# Altium PCB 如意硬件采集模块0831.PcbDoc (part 3 of 3)
Units mm, origin at the board's own origin, x right, y up, seen from the top; angles counter-clockwise.
Board outline 146 x 59 mm, 2 copper layers (Top Layer, Bottom Layer); 262 components, 188 nets, 705 pads, 120 vias.
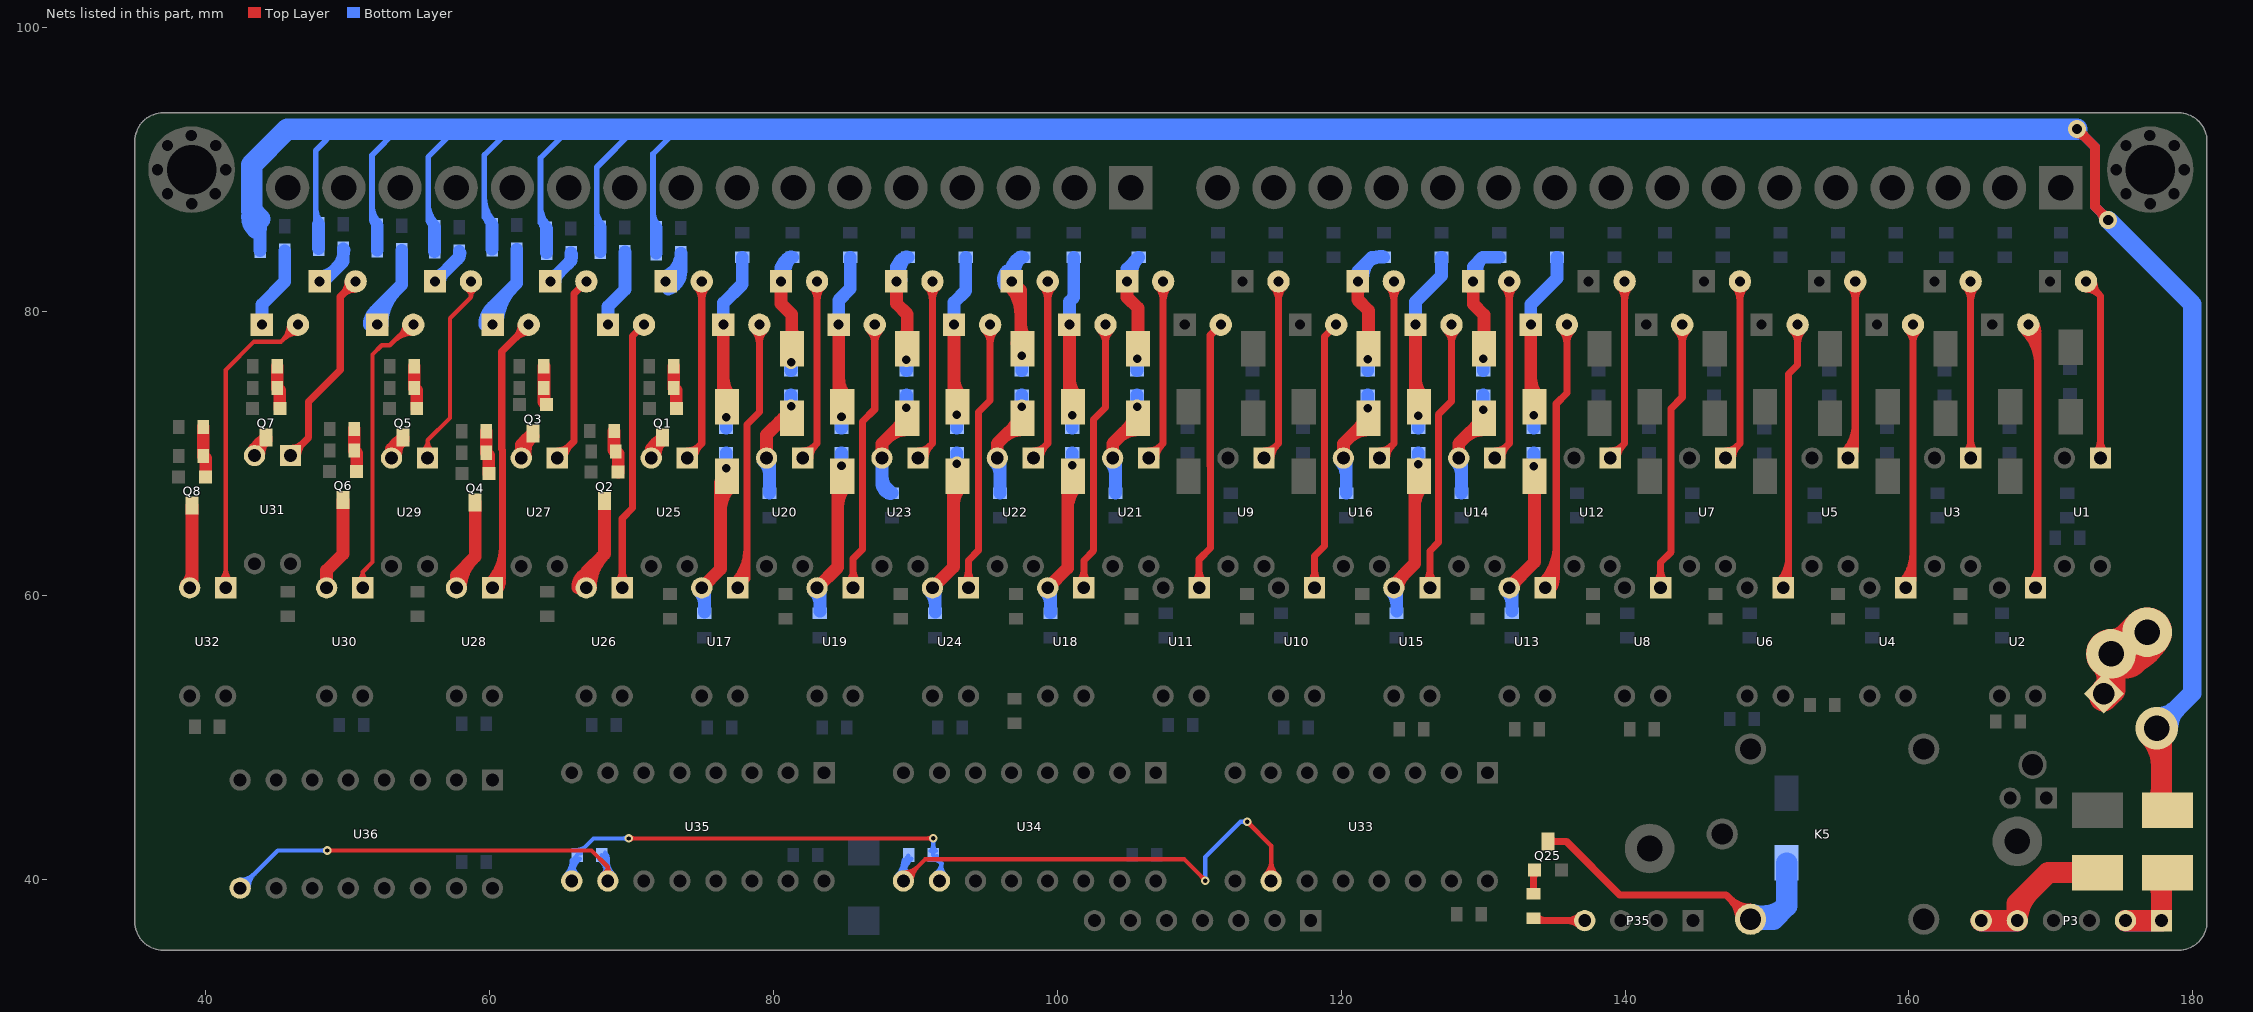
[diagram p3: the nets of this part, all layers, seen from the top]

## Via types
v1: diameter 1, hole 0.6, Top Layer to Bottom Layer, 53 vias
v2: diameter 0.6, hole 0.3, Top Layer to Bottom Layer, 29 vias
v3: diameter 1.27, hole 0.711, Top Layer to Bottom Layer, 19 vias
v4: diameter 1.5, hole 0.8, Top Layer to Bottom Layer, 17 vias
v5: diameter 3, hole 1.8, Top Layer to Bottom Layer, 1 vias
v6: diameter 0.7, hole 0.4, Top Layer to Bottom Layer, 1 vias

## Nets (pads, with @x,y where several pads share a name; then routed paths per layer and width w, separated by ;. In a path a pad name is that pad's centre, name@x,y a point inside that pad or via, vN(x,y) a via of type N, cw(c..) or ccw(c..) an arc to the next point about the centre after c; other vN are vias at no path point) (continued)
NetD13_1: D13.1 R42.2 R53.1 U13.2 | length 14
  Top Layer w0.9: U13.2@131.838,60.531 131.838,60.577 133.616,62.355 D13.1@133.616,68.405 ; U13.2@132.138,60.531 cw(c132.973,60.531) 132.382,61.121 ; D13.1@133.333,67.722 cw(c132.648,67.038) 133.616,67.038 cw(c134.584,67.038) D13.1@133.899,67.722
  Bottom Layer w0.9: U13.2@131.626,60.319 cw(c130.638,59.331) 132.035,59.331 ; R42.2@132.035,58.9 U13.2@132.035,60.334 ; v1@133.559,69.341 R53.1@133.559,70.053
  other v1: 133.575,69.1
NetD13_2: D13.2 LD13.1 R41.2 R53.2 | length 17.2
  Top Layer w0.9: LD13.1@133.123,78.834 cw(c132.547,78.258) 133.362,78.258 cw(c134.177,78.258) LD13.1@133.601,78.834 ; D13.2@133.362,73.559 LD13.1@133.362,79.073 ; 133.362,75.285 ccw(c135.197,75.285) D13.2@133.899,73.988 ; D13.2@133.362,73.287 ccw(c134.155,73.287) 133.594,72.726 cw(c134.155,73.287) D13.2@133.362,73.287
  Bottom Layer w0.9: LD13.1@133.123,79.312 ccw(c132.547,79.888) 133.362,79.888 ccw(c134.177,79.888) LD13.1@133.601,79.312 ; LD13.1@133.362,79.073 133.362,80.512 135.197,82.347 R41.2@135.197,83.826 ; R53.2@133.559,71.78 v1(133.559,72.691)
NetD14_1: D14.1 R44.2 R54.1 U14.2 | length 10.8
  Top Layer w0.9: U14.2@128.282,69.675 128.282,70.691 D14.1@130.06,72.469 ; 128.694,71.103 cw(c130.06,69.738) D14.1@130.06,71.669 ; D14.1@129.447,71.856 ccw(c128.224,73.078) D14.1@129.953,73.078
  Bottom Layer w0.9: U14.2@128.07,69.463 cw(c127.082,68.475) 128.479,68.475 ; R44.2@128.479,67.208 U14.2@128.479,69.478 ; v1(130.003,73.078) R54.1@130.003,74.117
NetD14_2: D14.2 LD14.1 R43.2 R54.2 | length 14.8
  Top Layer w0.9: LD14.1@129.059,81.882 cw(c128.483,81.306) 129.298,81.306 cw(c130.113,81.306) LD14.1@129.537,81.882 ; LD14.1@129.298,82.121 129.298,80.527 130.06,79.765 D14.2@130.06,77.369 ; D14.2@129.777,78.052 ccw(c129.092,78.736) 130.06,78.736 ccw(c131.028,78.736) D14.2@130.343,78.052
  Bottom Layer w0.9: LD14.1@129.059,82.36 ccw(c128.483,82.936) 129.298,82.936 ccw(c130.113,82.936) LD14.1@129.537,82.36 ; LD14.1@129.298,82.121 129.298,83.148 129.976,83.826 ; LD14.1@129.616,82.234 cw(c131.057,82.745) 129.976,83.826 ; R54.2@130.003,75.844 v1(130.003,76.672) ; R43.2@131.133,83.826 129.976,83.826
NetD15_1: D15.1 R46.2 R55.1 U15.2 | length 14.9
  Top Layer w0.9: U15.2@123.71,60.531 123.71,60.76 125.175,62.225 125.175,68.092 D15.1@125.488,68.405 ; U15.2@124.01,60.531 cw(c125.287,60.531) 124.384,61.434 ; 125.175,66.282 cw(c127.212,66.282) D15.1@125.771,67.722
  Bottom Layer w0.9: U15.2@123.498,60.319 cw(c122.51,59.331) 123.907,59.331 ; U15.2@123.71,60.531 123.907,60.334 R46.2@123.907,58.875 ; v1(125.431,69.231) R55.1@125.431,70.053
NetD15_2: D15.2 LD15.1 R45.2 R55.2 | length 17.2
  Top Layer w0.9: LD15.1@124.995,78.834 cw(c124.419,78.258) 125.234,78.258 cw(c126.049,78.258) LD15.1@125.473,78.834 ; D15.2@125.234,73.559 LD15.1@125.234,79.073 ; 125.234,75.285 ccw(c127.069,75.285) D15.2@125.771,73.988 ; D15.2@125.234,73.265 ccw(c126.027,73.265) 125.466,72.704 cw(c126.027,73.265) D15.2@125.234,73.265
  Bottom Layer w0.9: LD15.1@124.995,79.312 ccw(c124.419,79.888) 125.234,79.888 ccw(c126.049,79.888) LD15.1@125.473,79.312 ; LD15.1@125.234,79.073 125.234,80.684 127.069,82.519 R45.2@127.069,83.826 ; R55.2@125.431,71.78 v1(125.431,72.669)
NetD16_1: D16.1 R48.2 R56.1 U16.2 | length 10.9
  Top Layer w0.9: U16.2@120.154,69.675 120.154,70.691 D16.1@121.932,72.469 ; 120.566,71.103 cw(c121.932,69.738) D16.1@121.932,71.669 ; D16.1@121.232,71.769 ccw(c119.802,73.2) D16.1@121.825,73.2
  Bottom Layer w0.9: U16.2@119.942,69.463 cw(c118.954,68.475) 120.351,68.475 ; R48.2@120.351,67.208 U16.2@120.351,69.478 ; v1(121.875,73.2) R56.1@121.875,74.117
NetD16_2: D16.2 LD16.1 R47.2 R56.2 | length 16
  Top Layer w0.9: LD16.1@120.931,81.882 cw(c120.355,81.306) 121.17,81.306 cw(c121.985,81.306) LD16.1@121.409,81.882 ; LD16.1@121.17,82.121 121.17,80.83 121.932,80.068 D16.2@121.932,77.369 ; D16.2@121.649,78.052 ccw(c120.964,78.736) 121.932,78.736 ccw(c122.9,78.736) D16.2@122.215,78.052
  Bottom Layer w0.9: LD16.1@121.17,82.121 121.17,82.82 122.176,83.826 ; LD16.1@121.507,82.132 cw(c123.793,82.208) 122.176,83.826 ; 121.73,83.38 cw(c122.911,82.199) R47.2@122.911,83.87 ; 121.808,83.458 cw(c122.81,82.456) R47.2@122.915,83.869 ; R56.2@121.875,75.844 v1(121.875,76.625) ; R47.2@123.005,83.826 122.176,83.826
NetD17_1: D17.1 R66.2 R81.1 U17.2 | length 14.8
  Top Layer w0.9: U17.2@74.942,60.531 76.275,61.864 76.275,67.96 D17.1@76.72,68.405 ; 76.275,65.964 cw(c78.762,65.964) D17.1@77.003,67.722 ; D17.1@76.57,68.255 ccw(c76.198,68.627) D17.1@76.634,68.922
  Bottom Layer w0.9: U17.2@74.73,60.319 cw(c73.742,59.331) 75.139,59.331 ; R66.2@75.139,58.825 U17.2@75.139,60.334 ; v1@76.663,69.162 R81.1@76.663,70.053
  other v1: 76.675,68.95
NetD17_2: D17.2 LD17.1 R65.2 R81.2 | length 15.6
  Top Layer w0.9: LD17.1@76.227,78.834 cw(c75.651,78.258) 76.466,78.258 cw(c77.281,78.258) LD17.1@76.705,78.834 ; D17.2@76.466,73.559 LD17.1@76.466,79.073 ; 76.466,75.285 ccw(c78.301,75.285) D17.2@77.003,73.988
  Bottom Layer w0.9: LD17.1@76.227,79.312 ccw(c75.651,79.888) 76.466,79.888 ccw(c77.281,79.888) LD17.1@76.705,79.312 ; LD17.1@76.466,79.073 76.466,80.591 77.793,81.918 R65.2@77.793,83.826 ; R81.2@76.663,71.78 v1(76.663,72.562)
NetD18_1: D18.1 R68.2 R82.1 U18.2 | length 13.9
  Top Layer w0.9: U18.2@99.326,60.531 100.725,61.93 100.725,68.026 D18.1@101.104,68.405 ; 100.725,66.123 cw(c102.987,66.123) D18.1@101.387,67.722
  Bottom Layer w0.9: U18.2@99.114,60.319 cw(c98.126,59.331) 99.523,59.331 ; R68.2@99.523,58.775 U18.2@99.523,60.334 ; v1(101.047,69.153) R82.1@101.047,70.053
NetD18_2: D18.2 LD18.1 R67.2 R82.2 | length 16.5
  Top Layer w0.9: LD18.1@100.611,78.834 cw(c100.035,78.258) 100.85,78.258 cw(c101.665,78.258) LD18.1@101.089,78.834 ; D18.2@100.85,73.559 LD18.1@100.85,79.073 ; 100.85,75.285 ccw(c102.685,75.285) D18.2@101.387,73.988 ; D18.2@100.85,73.274 ccw(c101.643,73.274) 101.082,72.713 cw(c101.643,73.274) D18.2@100.85,73.274
  Bottom Layer w0.9: LD18.1@100.611,79.312 ccw(c100.035,79.888) 100.85,79.888 ccw(c101.665,79.888) LD18.1@101.089,79.312 ; LD18.1@100.85,79.073 100.85,80.7 101.161,81.011 R67.2@101.161,83.826 ; R82.2@101.047,71.78 v1(101.047,72.678)
NetD19_1: D19.1 R70.2 R83.1 U19.2 | length 13.7
  Top Layer w0.9: U19.2@83.07,60.531 84.525,61.986 84.525,68.082 D19.1@84.848,68.405 ; 84.525,66.258 cw(c86.596,66.258) D19.1@85.131,67.722
  Bottom Layer w0.9: U19.2@82.858,60.319 cw(c81.87,59.331) 83.267,59.331 ; R70.2@83.267,58.875 U19.2@83.267,60.334 ; v1(84.791,69.134) R83.1@84.791,70.053
NetD19_2: D19.2 LD19.1 R69.2 R83.2 | length 15.4
  Top Layer w0.9: LD19.1@84.355,78.834 cw(c83.779,78.258) 84.594,78.258 cw(c85.409,78.258) LD19.1@84.833,78.834 ; D19.2@84.594,73.559 LD19.1@84.594,79.073 ; 84.594,75.285 ccw(c86.429,75.285) D19.2@85.131,73.988
  Bottom Layer w0.9: LD19.1@84.355,79.312 ccw(c83.779,79.888) 84.594,79.888 ccw(c85.409,79.888) LD19.1@84.833,79.312 ; LD19.1@84.594,79.073 84.594,80.794 85.413,81.613 R69.2@85.413,83.826 ; R83.2@84.791,71.78 v1(84.791,72.591)
NetD20_1: D20.1 R72.2 R84.1 U20.2 | length 9.3
  Top Layer w0.9: U20.2@79.514,69.675 79.514,71.314 80.669,72.469 D20.1@81.292,72.469 ; 80.427,72.227 cw(c81.255,71.399) D20.1@81.32,72.568
  Bottom Layer w0.9: U20.2@79.302,69.463 cw(c78.314,68.475) 79.711,68.475 ; U20.2@79.514,69.675 79.711,69.478 R72.2@79.711,67.208 ; v1(81.235,73.31) R84.1@81.235,74.117
NetD20_2: D20.2 LD20.1 R71.2 R84.2 | length 16.8
  Top Layer w0.9: LD20.1@80.291,81.882 cw(c79.715,81.306) 80.53,81.306 cw(c81.345,81.306) LD20.1@80.769,81.882 ; LD20.1@80.53,82.121 80.53,80.545 81.292,79.783 D20.2@81.292,77.369 ; D20.2@81.009,78.052 ccw(c80.324,78.736) 81.292,78.736 ccw(c82.26,78.736) D20.2@81.575,78.052
  Bottom Layer w0.9: LD20.1@80.291,82.36 ccw(c79.715,82.936) 80.53,82.936 ccw(c81.345,82.936) LD20.1@80.769,82.36 ; LD20.1@80.53,82.121 80.53,83.105 R71.2@81.251,83.826 ; LD20.1@80.53,82.18 cw(c82.901,82.18) R71.2@81.225,83.857 ; LD20.1@80.53,82.803 cw(c81.682,82.803) R71.2@81.239,83.866 ; LD20.1@80.852,82.22 cw(c82.385,82.692) R71.2@81.251,83.826 ; R84.2@81.235,75.844 v1(81.235,76.44) ; R71.2@81.349,83.826 R71.2@81.251,83.826
NetD21_1: D21.1 R74.2 R85.1 U21.2 | length 11
  Top Layer w0.9: U21.2@103.898,69.675 103.898,70.691 D21.1@105.676,72.469 ; 104.31,71.103 cw(c105.676,69.738) D21.1@105.676,71.669 ; D21.1@104.91,71.703 ccw(c103.319,73.294) D21.1@105.569,73.294
  Bottom Layer w0.9: U21.2@103.686,69.463 cw(c102.698,68.475) 104.095,68.475 ; R74.2@104.095,67.208 U21.2@104.095,69.478 ; v1(105.619,73.294) R85.1@105.619,74.117
NetD21_2: D21.2 LD21.1 R73.2 R85.2 | length 13.8
  Top Layer w0.9: LD21.1@104.914,82.121 104.914,81.011 105.676,80.249 D21.2@105.676,77.369 ; D21.2@105.393,78.052 ccw(c104.708,78.736) 105.676,78.736 ccw(c106.644,78.736) D21.2@105.959,78.052 ; 104.914,81.306 ccw(c104.099,81.306) 104.675,81.882 cw(c104.099,81.306) 104.914,81.306 ; 104.914,81.306 cw(c105.729,81.306) 105.153,81.882 ccw(c105.729,81.306) 104.914,81.306
  Bottom Layer w0.9: LD21.1@104.914,82.121 104.914,83.007 R73.2@105.733,83.826 ccw(c107.003,82.555) LD21.1@105.244,82.19 ; R85.2@105.619,75.844 v1(105.619,76.681)
NetD22_1: D22.1 R76.2 R86.1 U22.2 | length 11
  Top Layer w0.9: U22.2@95.77,69.675 95.77,70.691 D22.1@97.548,72.469 ; 96.182,71.103 cw(c97.548,69.738) D22.1@97.548,71.669 ; D22.1@96.784,71.705 ccw(c95.198,73.291) D22.1@97.441,73.291
  Bottom Layer w0.9: U22.2@95.558,69.463 cw(c94.57,68.475) 95.967,68.475 ; R76.2@95.967,67.208 U22.2@95.967,69.478 ; v1(97.491,73.291) R86.1@97.491,74.117
NetD22_2: D22.2 LD22.1 R75.2 R86.2 | length 19.6
  Top Layer w0.9: LD22.1@96.547,81.882 cw(c94.429,79.764) 97.425,79.764 ; LD22.1@96.786,82.121 97.425,81.482 97.425,77.492 D22.2@97.548,77.369 ; D22.2@97.154,77.763 cw(c96.415,77.024) D22.2@97.45,76.882 ; 97.425,79.033 ccw(c98.813,79.033) D22.2@97.831,78.052
  Bottom Layer w0.9: LD22.1@96.263,81.913 cw(c97.079,82.237) LD22.1@96.458,82.858 ; LD22.1@96.547,82.36 ccw(c95.971,82.936) 96.786,82.936 ccw(c97.601,82.936) LD22.1@97.025,82.36 ; LD22.1@96.786,82.121 96.786,83.186 R75.2@97.426,83.826 ; LD22.1@96.786,82.18 cw(c99.157,82.18) R75.2@97.481,83.857 ; LD22.1@96.786,82.859 cw(c97.857,82.859) R75.2@97.497,83.867 ; LD22.1@97.1,82.246 cw(c98.464,82.788) R75.2@97.426,83.826 ; R86.2@97.491,75.844 v1@97.491,76.659 ; R75.2@97.605,83.826 R75.2@97.426,83.826
  other v1: 97.5,76.875
NetD23_1: D23.1 R78.2 R87.1 U23.2 | length 12.9
  Top Layer w0.9: U23.2@87.642,69.675 87.642,70.691 D23.1@89.42,72.469 ; 88.054,71.103 cw(c89.42,69.738) D23.1@89.42,71.669 ; D23.1@88.712,71.761 ccw(c87.261,73.212) D23.1@89.313,73.212
  Bottom Layer w0.9: 87.642,68.579 ccw(c89.624,68.579) R78.2@88.223,67.177 ; U23.2@87.642,69.675 87.642,67.913 ; R78.2@88.244,67.165 cw(c88.407,67.913) 87.642,67.913 ; R78.2@88.347,67.208 87.642,67.913 ; v1(89.363,73.212) R87.1@89.363,74.117
NetD23_2: D23.2 LD23.1 R77.2 R87.2 | length 16.9
  Top Layer w0.9: LD23.1@88.419,81.882 cw(c87.843,81.306) 88.658,81.306 cw(c89.473,81.306) LD23.1@88.897,81.882 ; LD23.1@88.658,82.121 88.658,80.567 89.42,79.805 D23.2@89.42,77.369 ; D23.2@89.137,78.052 ccw(c88.452,78.736) 89.42,78.736 ccw(c90.388,78.736) D23.2@89.703,78.052
  Bottom Layer w0.9: LD23.1@88.419,82.36 ccw(c87.843,82.936) 88.658,82.936 ccw(c89.473,82.936) LD23.1@88.897,82.36 ; LD23.1@88.658,82.121 88.658,83.158 R77.2@89.326,83.826 ; LD23.1@88.658,82.18 cw(c91.029,82.18) R77.2@89.353,83.857 ; LD23.1@88.658,82.84 cw(c89.756,82.84) R77.2@89.368,83.867 ; LD23.1@88.975,82.237 cw(c90.396,82.756) R77.2@89.326,83.826 ; R87.2@89.363,75.844 v1(89.363,76.587) ; R77.2@89.477,83.826 R77.2@89.326,83.826
NetD24_1: D24.1 R80.2 R88.1 U24.2 | length 13.6
  Top Layer w0.9: U24.2@91.198,60.531 92.675,62.008 92.675,68.104 D24.1@92.976,68.405 ; 92.675,66.311 cw(c94.671,66.311) D24.1@93.259,67.722
  Bottom Layer w0.9: U24.2@90.986,60.319 cw(c89.998,59.331) 91.395,59.331 ; R80.2@91.395,58.825 U24.2@91.395,60.334 ; v1(92.919,69.281) R88.1@92.919,70.053
NetD24_2: D24.2 LD24.1 R79.2 R88.2 | length 16.8
  Top Layer w0.9: LD24.1@92.483,78.834 cw(c91.907,78.258) 92.722,78.258 cw(c93.537,78.258) LD24.1@92.961,78.834 ; D24.2@92.722,73.559 LD24.1@92.722,79.073 ; 92.722,75.285 ccw(c94.557,75.285) D24.2@93.259,73.988 ; D24.2@92.722,73.327 ccw(c93.515,73.327) 92.954,72.766 cw(c93.515,73.327) D24.2@92.722,73.327
  Bottom Layer w0.9: LD24.1@92.483,79.312 ccw(c91.907,79.888) 92.722,79.888 ccw(c93.537,79.888) LD24.1@92.961,79.312 ; LD24.1@92.722,79.073 92.722,80.647 93.541,81.466 R79.2@93.541,83.826 ; R88.2@92.919,71.78 v1(92.919,72.731)
NetD57_1: D57.1 K5.2 Q25.C | length 29.2
  Top Layer w0.5: Q25.C@134.569,42.672 135.853,42.672 139.625,38.9 147.125,38.9 K5.2@148.845,37.18 ; Q25.C@134.716,42.525 cw(c135.069,42.172) 135.069,42.672 cw(c135.069,43.172) Q25.C@134.716,42.819 ; K5.2@147.995,37.18 ccw(c145.943,37.18) 147.394,38.631 ccw(c148.845,40.082) K5.2@148.845,38.03
  Bottom Layer w1.5: K5.2@148.845,37.18 150.455,37.18 151.384,38.109 ; K5.2@148.95,37.514 ccw(c149.677,39.816) 151.384,38.109 ; D57.1@151.384,41.148 151.384,38.109
NetF1_2: F1.2 P3.1 P3.2 | length 9.8
  Top Layer w1.5: P3.2@175.26,37.084 P3.1@177.8,37.084 177.8,39.624 F1.2@177.8,40.472 ; F1.2@177.321,40.118 cw(c176.166,38.963) 177.8,38.963
  Bottom Layer w1.5: P3.2@175.26,37.084 P3.1@177.8,37.084
NetF2_2: F2.2 P3.5 P3.6 | length 15.5
  Top Layer w1.5: P3.6@165.1,37.084 P3.5@167.64,37.084 ; 168.493,39.143 ccw(c170.552,37.084) P3.5@167.64,37.084 ; F2.2@173.7,40.472 169.822,40.472 167.64,38.29 P3.5@167.64,37.084
  Bottom Layer w1.5: P3.6@165.1,37.084 P3.5@167.64,37.084
NetLD1_2: LD1.2 U1.1 | length 16.8
  Top Layer w0.5: LD1.2@172.478,81.584 cw(c172.478,80.286) 173.395,81.204 cw(c174.313,82.121) LD1.2@173.015,82.121 ; LD1.2@172.478,82.121 173.494,81.105 U1.1@173.494,69.675 ; U1.1@173.14,70.029 ccw(c172.287,70.882) 173.494,70.882 ccw(c174.701,70.882) U1.1@173.848,70.029
NetLD2_2: LD2.2 U2.1 | length 26.3
  Top Layer w0.5: LD2.2@168.034,78.693 cw(c165.521,76.18) 169.075,76.18 ; LD2.2@168.388,79.047 cw(c166.728,77.387) 169.075,77.387 ; LD2.2@168.414,79.073 169.075,78.412 169.075,60.684 U2.1@168.922,60.531 ; U2.1@168.568,60.885 ccw(c167.346,62.107) 169.075,62.107 ; LD2.2@168.741,79.4 cw(c167.935,78.594) 169.075,78.594 ; 169.075,61.369 ccw(c169.76,61.369) U2.1@169.276,60.885
NetLD3_2: LD3.2 U6.1 | length 24
  Top Layer w0.5: U6.1@150.788,60.885 ccw(c149.01,62.663) 151.525,62.663 ; 151.525,61.456 cw(c150.217,61.456) U6.1@151.142,60.531 151.525,60.914 151.525,75.6 152.158,76.233 LD3.2@152.158,79.073 ; LD3.2@151.778,78.693 cw(c150.861,77.776) 152.158,77.776 cw(c153.455,77.776) LD3.2@152.538,78.693
NetLD4_2: LD4.2 U3.1 | length 16.4
  Top Layer w0.5: LD4.2@163.97,81.741 cw(c163.053,80.824) 164.35,80.824 cw(c165.647,80.824) LD4.2@164.73,81.741 ; U3.1@163.996,70.029 ccw(c163.143,70.882) 164.35,70.882 ccw(c165.557,70.882) U3.1@164.704,70.029 ; U3.1@164.35,69.675 LD4.2@164.35,82.121
NetLD5_2: LD5.2 U4.1 | length 24.5
  Top Layer w0.5: U4.1@159.424,60.885 ccw(c157.344,62.965) 160.286,62.965 ; LD5.2@159.906,78.693 cw(c158.989,77.776) 160.286,77.776 cw(c161.583,77.776) LD5.2@160.666,78.693 ; 160.286,61.757 cw(c158.552,61.757) U4.1@159.778,60.531 160.286,61.039 LD5.2@160.286,79.073
NetLD6_2: LD6.2 U5.1 | length 18.4
  Top Layer w0.5: U5.1@155.36,70.029 ccw(c153.28,72.109) 156.222,72.109 ; LD6.2@155.842,81.741 cw(c154.925,80.824) 156.222,80.824 cw(c157.519,80.824) LD6.2@156.602,81.741 ; 156.222,70.901 cw(c154.488,70.901) U5.1@155.714,69.675 156.222,70.183 LD6.2@156.222,82.121
NetLD7_2: LD7.2 U7.1 | length 16.8
  Top Layer w0.5: U7.1@147.078,69.675 148.094,70.691 LD7.2@148.094,82.121 ; U7.1@147.078,70.175 ccw(c147.078,71.382) 147.932,70.529 ccw(c148.785,69.675) U7.1@147.578,69.675 ; LD7.2@147.714,81.741 cw(c146.797,80.824) 148.094,80.824 cw(c149.391,80.824) LD7.2@148.474,81.741
NetLD8_2: LD8.2 U8.1 | length 23.1
  Top Layer w0.5: U8.1@142.152,60.885 ccw(c141.299,61.738) 142.506,61.738 ccw(c143.713,61.738) U8.1@142.86,60.885 ; U8.1@142.506,60.531 142.506,62.306 143.25,63.05 143.25,73.175 144.03,73.955 LD8.2@144.03,79.073 ; LD8.2@143.65,78.693 cw(c142.733,77.776) 144.03,77.776 cw(c145.327,77.776) LD8.2@144.41,78.693
NetLD9_2: LD9.2 U9.1 | length 16.8
  Top Layer w0.5: U9.1@114.566,69.675 115.582,70.691 LD9.2@115.582,82.121 ; U9.1@114.566,70.175 ccw(c114.566,71.382) 115.42,70.529 ccw(c116.273,69.675) U9.1@115.066,69.675 ; LD9.2@115.202,81.741 cw(c114.285,80.824) 115.582,80.824 cw(c116.879,80.824) LD9.2@115.962,81.741
NetLD10_2: LD10.2 U10.1 | length 21.1
  Top Layer w0.5: U10.1@117.768,60.885 ccw(c116.915,61.738) 118.122,61.738 ccw(c119.329,61.738) U10.1@118.476,60.885 ; U10.1@118.122,60.531 118.122,62.772 118.825,63.475 118.825,78.252 LD10.2@119.646,79.073
NetLD11_2: LD11.2 U11.1 | length 21.1
  Top Layer w0.5: U11.1@109.64,60.885 ccw(c108.787,61.738) 109.994,61.738 ccw(c111.201,61.738) U11.1@110.348,60.885 ; U11.1@109.994,60.531 109.994,62.544 110.8,63.35 110.8,69.1 110.772,69.128 110.772,78.327 LD11.2@111.518,79.073
NetLD12_2: LD12.2 U12.1 | length 16.8
  Top Layer w0.5: U12.1@138.95,69.675 139.966,70.691 LD12.2@139.966,82.121 ; U12.1@138.95,70.175 ccw(c138.95,71.382) 139.804,70.529 ccw(c140.657,69.675) U12.1@139.45,69.675 ; LD12.2@139.586,81.741 cw(c138.669,80.824) 139.966,80.824 cw(c141.263,80.824) LD12.2@140.346,81.741
NetLD13_2: LD13.2 U13.1 | length 27.4
  Top Layer w0.5: U13.1@134.024,60.885 ccw(c131.307,63.602) 135.15,63.602 ; U13.1@134.732,60.177 ccw(c133.721,61.188) 135.15,61.188 ; 135.15,62.395 cw(c132.514,62.395) U13.1@134.378,60.531 135.15,61.303 135.15,73.5 135.902,74.252 LD13.2@135.902,79.073 ; LD13.2@135.522,78.693 cw(c134.605,77.776) 135.902,77.776 cw(c137.199,77.776) LD13.2@136.282,78.693
NetLD14_2: LD14.2 U14.1 | length 16.8
  Top Layer w0.5: U14.1@130.822,69.675 131.838,70.691 LD14.2@131.838,82.121 ; U14.1@130.822,70.175 ccw(c130.822,71.382) 131.676,70.529 ccw(c132.529,69.675) U14.1@131.322,69.675 ; LD14.2@131.458,81.741 cw(c130.541,80.824) 131.838,80.824 cw(c133.135,80.824) LD14.2@132.218,81.741
NetLD15_2: LD15.2 U15.1 | length 23.1
  Top Layer w0.5: U15.1@125.896,60.885 ccw(c125.043,61.738) 126.25,61.738 ccw(c127.457,61.738) U15.1@126.604,60.885 ; U15.1@126.25,60.531 126.25,63.125 126.843,63.718 126.843,72.743 127.774,73.674 LD15.2@127.774,79.073 ; LD15.2@127.394,78.693 cw(c126.477,77.776) 127.774,77.776 cw(c129.071,77.776) LD15.2@128.154,78.693
NetLD16_2: LD16.2 U16.1 | length 16.8
  Top Layer w0.5: U16.1@122.694,69.675 123.71,70.691 LD16.2@123.71,82.121 ; U16.1@122.694,70.175 ccw(c122.694,71.382) 123.548,70.529 ccw(c124.401,69.675) U16.1@123.194,69.675 ; LD16.2@123.33,81.741 cw(c122.413,80.824) 123.71,80.824 cw(c125.007,80.824) LD16.2@124.09,81.741
NetLD17_2: LD17.2 U17.1 | length 25.6
  Top Layer w0.5: U17.1@77.128,60.885 ccw(c74.723,63.29) 78.125,63.29 ; 78.125,62.083 cw(c75.93,62.083) U17.1@77.482,60.531 78.125,61.174 78.125,72.05 79.006,72.931 LD17.2@79.006,79.073 ; LD17.2@78.626,78.693 cw(c77.709,77.776) 79.006,77.776 cw(c80.303,77.776) LD17.2@79.386,78.693
NetLD18_2: LD18.2 U18.1 | length 23.1
  Top Layer w0.5: U18.1@101.512,60.885 ccw(c100.659,61.738) 101.866,61.738 ccw(c103.073,61.738) U18.1@102.22,60.885 ; U18.1@101.866,60.531 101.866,62.466 102.55,63.15 102.55,72.4 103.39,73.24 LD18.2@103.39,79.073 ; LD18.2@103.01,78.693 cw(c102.093,77.776) 103.39,77.776 cw(c104.687,77.776) LD18.2@103.77,78.693
NetLD19_2: LD19.2 U19.1 | length 23.1
  Top Layer w0.5: U19.1@85.256,60.885 ccw(c84.403,61.738) 85.61,61.738 ccw(c86.817,61.738) U19.1@85.964,60.885 ; U19.1@85.61,60.531 85.61,62.585 86.275,63.25 86.275,72.25 87.134,73.109 LD19.2@87.134,79.073 ; LD19.2@86.754,78.693 cw(c85.837,77.776) 87.134,77.776 cw(c88.431,77.776) LD19.2@87.514,78.693
NetLD20_2: LD20.2 U20.1 | length 16.8
  Top Layer w0.5: U20.1@82.054,69.675 83.07,70.691 LD20.2@83.07,82.121 ; U20.1@82.054,70.175 ccw(c82.054,71.382) 82.908,70.529 ccw(c83.761,69.675) U20.1@82.554,69.675 ; LD20.2@82.69,81.741 cw(c81.773,80.824) 83.07,80.824 cw(c84.367,80.824) LD20.2@83.45,81.741
NetLD21_2: LD21.2 U21.1 | length 16.8
  Top Layer w0.5: U21.1@106.438,69.675 107.454,70.691 LD21.2@107.454,82.121 ; U21.1@106.438,70.175 ccw(c106.438,71.382) 107.292,70.529 ccw(c108.145,69.675) U21.1@106.938,69.675 ; LD21.2@107.074,81.741 cw(c106.157,80.824) 107.454,80.824 cw(c108.751,80.824) LD21.2@107.834,81.741
NetLD22_2: LD22.2 U22.1 | length 16.8
  Top Layer w0.5: U22.1@98.31,69.675 99.326,70.691 LD22.2@99.326,82.121 ; U22.1@98.31,70.175 ccw(c98.31,71.382) 99.164,70.529 ccw(c100.017,69.675) U22.1@98.81,69.675 ; LD22.2@98.946,81.741 cw(c98.029,80.824) 99.326,80.824 cw(c100.623,80.824) LD22.2@99.706,81.741
NetLD23_2: LD23.2 U23.1 | length 16.8
  Top Layer w0.5: U23.1@90.182,69.675 91.198,70.691 LD23.2@91.198,82.121 ; U23.1@90.182,70.175 ccw(c90.182,71.382) 91.036,70.529 ccw(c91.889,69.675) U23.1@90.682,69.675 ; LD23.2@90.818,81.741 cw(c89.901,80.824) 91.198,80.824 cw(c92.495,80.824) LD23.2@91.578,81.741
NetLD24_2: LD24.2 U24.1 | length 23.1
  Top Layer w0.5: U24.1@93.384,60.885 ccw(c92.531,61.738) 93.738,61.738 ccw(c94.945,61.738) U24.1@94.092,60.885 ; U24.1@93.738,60.531 93.738,62.463 94.45,63.175 94.45,72.925 95.262,73.737 LD24.2@95.262,79.073 ; LD24.2@94.882,78.693 cw(c93.965,77.776) 95.262,77.776 cw(c96.559,77.776) LD24.2@95.642,78.693
NetLD25_1: LD25.1 R113.2 | length 7.4
  Bottom Layer w0.9: LD25.1@72.291,82.44 ccw(c71.711,84.11) R113.2@73.479,84.11 73.479,83.004 72.596,82.121 LD25.1@72.402,82.121 ; LD25.1@72.402,82.458 ccw(c72.402,83.741) 73.309,82.834 ; LD25.1@72.587,81.59 ccw(c72.151,82.844) 73.479,82.844
NetLD25_2: LD25.2 U25.1 | length 16.8
  Top Layer w0.5: U25.1@73.926,69.675 74.942,70.691 LD25.2@74.942,82.121 ; U25.1@73.926,70.175 ccw(c73.926,71.382) 74.78,70.529 ccw(c75.633,69.675) U25.1@74.426,69.675 ; LD25.2@74.562,81.741 cw(c73.645,80.824) 74.942,80.824 cw(c76.239,80.824) LD25.2@75.322,81.741
NetLD26_1: LD26.1 R114.2 | length 6.9
  Bottom Layer w0.9: LD26.1@68.099,79.312 ccw(c67.523,79.888) 68.338,79.888 ccw(c69.153,79.888) LD26.1@68.577,79.312 ; LD26.1@68.338,79.073 68.338,80.363 69.534,81.559 R114.2@69.534,84.197
NetLD26_2: LD26.2 U26.1 | length 21.1
  Top Layer w0.5: U26.1@68.988,60.885 ccw(c68.135,61.738) 69.342,61.738 ccw(c70.549,61.738) U26.1@69.696,60.885 ; U26.1@69.342,60.531 69.342,65.417 70.075,66.15 70.075,78.27 LD26.2@70.878,79.073
NetLD27_1: LD27.1 R119.2 | length 4.6
  Bottom Layer w0.9: LD27.1@64.274,82.121 65.739,83.586 R119.2@65.739,84.122 ; LD27.1@64.274,82.458 ccw(c64.274,83.273) 64.85,82.697 ccw(c65.426,82.121) LD27.1@64.611,82.121 ; 65.501,83.348 ccw(c64.82,84.028) R119.2@65.783,84.028
NetLD27_2: LD27.2 U27.1 | length 15.2
  Top Layer w0.5: U27.1@64.77,69.675 65.95,70.855 65.95,81.257 LD27.2@66.814,82.121 ; U27.1@64.77,70.175 ccw(c64.77,71.382) 65.624,70.529 ccw(c66.477,69.675) U27.1@65.27,69.675
NetLD28_1: LD28.1 R115.2 | length 11.6
  Bottom Layer w0.9: LD28.1@59.647,79.073 cw(c61.276,79.073) 60.124,80.224 ; LD28.1@59.971,79.312 ccw(c59.395,79.888) 60.21,79.888 ccw(c61.025,79.888) LD28.1@60.449,79.312 ; LD28.1@60.21,79.073 60.21,80.31 61.911,82.011 R115.2@61.911,84.38 ; LD28.1@60.547,79.073 cw(c64.348,79.073) 61.661,81.761
NetLD28_2: LD28.2 U28.1 | length 27.4
  Top Layer w0.5: U28.1@59.844,60.885 ccw(c57.284,63.445) 60.905,63.445 ; U28.1@60.552,60.177 ccw(c59.698,61.031) U28.1@60.905,61.031 ; 60.905,62.238 cw(c58.491,62.238) U28.1@60.198,60.531 60.905,61.238 60.905,70.254 60.85,70.309 60.85,77.173 LD28.2@62.75,79.073 ; LD28.2@62.213,79.073 cw(c60.915,79.073) 61.833,78.156 cw(c62.75,77.238) LD28.2@62.75,78.536
NetLD29_1: LD29.1 R116.2 | length 4.6
  Bottom Layer w0.9: LD29.1@56.146,82.121 57.86,83.835 R116.2@57.86,84.222 ; LD29.1@56.146,82.458 ccw(c56.146,83.273) 56.722,82.697 ccw(c57.298,82.121) LD29.1@56.483,82.121 ; 57.727,83.702 ccw(c57.3,84.128) R116.2@57.904,84.128
NetLD29_2: LD29.2 U29.1 | length 16.9
  Top Layer w0.3: U29.1@55.25,70.143 ccw(c54.622,70.926) 55.626,70.926 ; U29.1@55.626,69.675 55.626,70.926 ; U29.1@56.002,70.143 cw(c56.63,70.926) 55.626,70.926 ; LD29.2@58.365,81.57 cw(c58.038,81.011) 58.686,81.011 ; LD29.2@58.686,82.121 58.686,81.011 ; LD29.2@59.007,81.57 ccw(c59.334,81.011) 58.686,81.011 ; 55.626,70.926 57.2,72.5 57.2,79.525 58.686,81.011
NetLD30_1: LD30.1 R120.2 | length 11
  Bottom Layer w0.9: LD30.1@51.519,79.073 cw(c52.839,79.073) 51.906,80.006 ; LD30.1@51.843,79.312 ccw(c51.267,79.888) 52.082,79.888 ccw(c52.897,79.888) LD30.1@52.321,79.312 ; LD30.1@52.082,79.073 52.082,80.182 53.813,81.913 R120.2@53.813,84.322 ; LD30.1@52.419,79.073 cw(c55.911,79.073) 53.442,81.542
NetLD30_2: LD30.2 U30.1 | length 25.4
  Top Layer w0.3: U30.1@50.72,61.03 ccw(c50.303,61.654) 51.054,61.654 ; U30.1@51.054,60.531 51.054,61.654 ; U30.1@51.388,61.03 cw(c51.805,61.654) 51.054,61.654 ; 53.18,77.838 cw(c54.622,76.396) LD30.2@54.622,78.436 ; 53.681,78.339 ccw(c52.947,79.073) LD30.2@53.985,79.073 ; 53.692,78.35 cw(c54.622,77.42) LD30.2@54.622,78.736 ; LD30.2@54.622,79.073 54.415,79.073 52.967,77.625 52.4,77.625 51.75,76.975 51.75,62.35 51.054,61.654
NetLD31_1: LD31.1 R117.2 | length 5.7
  Bottom Layer w0.9: LD31.1@48.018,82.121 48.271,82.121 49.692,83.542 R117.2@49.692,84.425 ; LD31.1@48.018,82.458 ccw(c48.018,83.884) 49.026,82.876 ; 49.208,83.058 ccw(c47.935,84.331) R117.2@49.736,84.331
NetLD31_2: LD31.2 U31.1 | length 18.1
  Top Layer w0.5: U31.1@45.974,69.85 47.25,71.126 47.25,73.65 49.475,75.875 49.475,81.038 LD31.2@50.558,82.121 ; U31.1@45.974,70.35 ccw(c45.974,71.557) 46.828,70.704 ccw(c47.681,69.85) U31.1@46.474,69.85 ; LD31.2@50.021,82.121 cw(c48.723,82.121) 49.641,81.204 cw(c50.558,80.286) LD31.2@50.558,81.584
NetLD32_1: LD32.1 R118.2 | length 7.2
  Bottom Layer w0.9: LD32.1@43.715,79.312 ccw(c43.139,79.888) 43.954,79.888 ccw(c44.769,79.888) LD32.1@44.193,79.312 ; LD32.1@43.954,79.073 43.954,80.504 45.561,82.111 R118.2@45.561,84.284
NetLD32_2: LD32.2 U32.1 | length 27.7
  Top Layer w0.3: U32.1@40.978,60.955 ccw(c39.953,61.98) 41.402,61.98 ccw(c42.851,61.98) U32.1@41.826,60.955 ; U32.1@41.402,60.531 41.402,75.885 43.396,77.879 45.3,77.879 LD32.2@46.494,79.073 ; LD32.2@45.857,79.073 cw(c44.318,79.073) 45.406,77.985 cw(c46.494,76.897) LD32.2@46.494,78.436 ; LD32.2@46.157,79.073 cw(c45.342,79.073) 45.918,78.497 cw(c46.494,77.921) LD32.2@46.494,78.736
NetQ1_1: Q1.1 R105.2 R121.2 | length 3.1
  Top Layer w0.9: R105.2@72.971,76.143 R121.2@72.971,74.619 73.152,74.438 Q1.1@73.152,73.152
NetQ1_2: Q1.2 U25.2 | length 6.5
  Top Layer w0.9: U25.2@71.386,69.443 cw(c73.173,69.443) Q1.2@72.191,70.936 ; U25.2@71.386,69.675 71.386,70.319 Q1.2@72.187,71.12 ccw(c73.422,69.885) U25.2@71.684,69.706 ; U25.2@71.386,69.928 cw(c72.42,69.928) Q1.2@72.188,70.935
NetQ2_1: Q2.1 R106.2 R122.2 | length 3
  Top Layer w0.9: R106.2@68.769,71.573 68.769,70.252 69.056,69.965 Q2.1@69.056,68.679
NetQ2_2: Q2.2 U26.2 | length 10.2
  Top Layer w0.9: U26.2@66.202,60.531 cw(c67.399,60.531) 66.553,61.378 ; U26.2@66.802,60.531 66.802,61.627 68.091,62.916 Q2.2@68.091,66.647 ; U26.2@67.102,60.531 cw(c70.472,60.531) 68.089,62.914
NetQ3_1: Q3.1 R107.2 R123.2 | length 3
  Top Layer w0.9: Q3.1@63.827,73.616 R123.2@63.827,74.619 R107.2@63.827,76.143 ; Q3.1@63.827,73.889 ccw(c64.462,73.889) Q3.1@64.013,73.44
NetQ3_2: Q3.2 U27.2 | length 7.3
  Top Layer w0.9: U27.2@62.23,69.475 cw(c64.501,69.475) Q3.2@63.047,71.22 ; U27.2@62.23,69.675 62.23,70.59 Q3.2@63.043,71.403 ccw(c64.37,70.075) U27.2@62.525,69.73 ; U27.2@62.23,70.194 cw(c63.281,70.194) Q3.2@63.044,71.218
NetQ4_1: Q4.1 R108.2 R124.2 | length 3.1
  Top Layer w0.9: R108.2@59.763,71.571 R124.2@59.763,70.047 59.944,69.866 Q4.1@59.944,68.58
NetQ4_2: Q4.2 U28.2 | length 8.8
  Top Layer w0.9: U28.2@57.658,60.531 57.658,61.408 58.979,62.729 Q4.2@58.979,66.548 ; U28.2@57.958,60.531 cw(c60.8,60.531) 58.79,62.54
NetQ5_1: Q5.1 R109.2 R125.2 | length 3.1
  Top Layer w0.9: R109.2@54.683,76.143 R125.2@54.683,74.619 54.864,74.438 Q5.1@54.864,73.152
NetQ5_2: Q5.2 U29.2 | length 6.5
  Top Layer w0.9: U29.2@53.086,69.437 cw(c54.871,69.437) Q5.2@53.903,70.936 ; U29.2@53.086,69.675 53.086,70.307 Q5.2@53.899,71.12 ccw(c55.157,69.862) U29.2@53.385,69.702 ; U29.2@53.086,69.911 cw(c54.137,69.911) Q5.2@53.9,70.935
NetQ6_1: Q6.1 R110.2 R126.2 | length 3.1
  Top Layer w0.9: R110.2@50.453,71.727 R126.2@50.453,70.203 50.634,70.022 Q6.1@50.634,68.736
NetQ6_2: Q6.2 U30.2 | length 6.7
  Top Layer w0.9: U30.2@48.514,60.531 48.514,61.764 49.669,62.919 Q6.2@49.669,66.704
NetQ7_1: Q7.1 R111.2 R127.2 | length 3.1
  Top Layer w0.9: R111.2@45.031,76.143 R127.2@45.031,74.619 45.212,74.438 Q7.1@45.212,73.152
NetQ7_2: Q7.2 U31.2 | length 6.1
  Top Layer w0.9: U31.2@43.434,69.581 cw(c44.967,69.581) Q7.2@44.25,70.936 ; U31.2@43.434,69.85 43.434,70.307 Q7.2@44.247,71.12 ccw(c45.485,69.881) U31.2@43.734,69.855 ; U31.2@43.434,69.911 cw(c44.485,69.911) Q7.2@44.248,70.935
NetQ8_1: Q8.1 R112.2 R128.2 | length 3.6
  Top Layer w0.9: R112.2@39.814,71.855 R128.2@39.814,69.823 39.995,69.642 Q8.1@39.995,68.356
NetQ8_2: Q8.2 U32.2 | length 6.6
  Top Layer w0.9: U32.2@38.65,60.743 ccw(c37.733,61.66) 39.03,61.66 ; U32.2@39.03,60.699 Q8.2@39.03,66.324
NetQ25_B: Q25.B R365.1 | length 2.1
  Top Layer w0.5: R365.1@133.547,38.992 Q25.B@133.547,40.583 ; 133.547,40.002 cw(c134.242,40.002) Q25.B@133.751,40.493
NetR206_1: R206.1 U33.10 U34.9 | length 46
  Top Layer w0.3: U34.9@89.154,39.878 90.676,41.4 108.95,41.4 v2@110.437,39.913 ; U34.9@89.154,40.478 ccw(c89.154,41.927) 90.178,40.902 ccw(c91.203,39.878) U34.9@89.754,39.878 ; 110.151,40.199 cw(c109.853,39.9) v2@110.275,39.9 ; 110.212,40.138 ccw(c110.425,40.352) v2@110.425,40.05 ; v2@113.375,43.9 cw(c113.375,43.538) 113.631,43.794 cw(c113.887,44.05) v2@113.525,44.05 ; v2(113.375,44.05) 115.062,42.363 U33.10@115.062,39.878 ; U33.10@114.638,40.302 ccw(c113.613,41.327) 115.062,41.327 ccw(c116.511,41.327) U33.10@115.486,40.302
  Bottom Layer w0.3: U34.9@88.73,40.302 ccw(c87.705,41.327) 89.154,41.327 ccw(c90.603,41.327) U34.9@89.578,40.302 ; U34.9@89.154,39.878 R206.1@89.154,41.335 ; U34.9@89.154,40.088 cw(c91.063,40.088) R206.1@89.713,41.438 ; 89.154,40.813 cw(c90.339,40.813) R206.1@89.501,41.65 ; v2@110.319,40.006 ccw(c110.063,40.262) 110.425,40.262 ccw(c110.787,40.262) v2@110.531,40.006 ; v2(110.425,39.9) 110.425,41.575 112.9,44.05 v2(113.375,44.05) ; v2@113.269,43.944 ccw(c113.013,43.688) 113.013,44.05 ccw(c113.013,44.412) v2@113.269,44.156
NetR206_2: R206.2 R207.1 U34.10 U35.9 | length 42.5
  Top Layer w0.3: v2(69.8,42.875) 91.175,42.875 v2@91.2,42.85 ; v2@69.906,42.769 cw(c70.162,42.513) 70.162,42.875 cw(c70.162,43.237) v2@69.906,42.981 ; 90.858,42.875 ccw(c90.858,43.292) v2@91.153,42.997 ; 90.935,42.875 cw(c90.935,42.567) v2@91.153,42.785
  Bottom Layer w0.3: U35.9@65.362,40.302 ccw(c64.337,41.327) 65.786,41.327 ccw(c67.235,41.327) U35.9@66.21,40.302 ; U35.9@65.786,39.878 R207.1@65.786,41.335 ; U35.9@65.786,40.088 cw(c67.695,40.088) R207.1@66.345,41.438 ; 65.786,40.813 cw(c66.971,40.813) R207.1@66.133,41.65 ; R207.1@66.164,41.713 67.326,42.875 v2(69.8,42.875) ; R207.1@66.164,42.063 ccw(c66.164,42.908) 66.761,42.31 ; R207.1@66.42,41.807 cw(c66.813,41.807) R207.1@66.535,42.085 ; v2@69.694,42.769 ccw(c69.438,42.513) 69.438,42.875 ccw(c69.438,43.237) v2@69.694,42.981 ; R206.2@91.078,41.988 ccw(c90.64,42.426) 91.259,42.426 ccw(c91.878,42.426) R206.2@91.44,41.988 ; v2@91.153,42.785 cw(c90.897,42.529) 91.259,42.529 cw(c91.621,42.529) v2@91.365,42.785 ; R206.2@91.259,41.363 cw(c91.259,40.518) 91.856,41.116 ; v2(91.259,42.891) R206.2@91.259,41.713 91.825,41.147 ; U34.10@91.393,40.397 ccw(c90.958,41.147) 91.825,41.147 ; R206.2@91.515,41.619 ccw(c91.908,41.619) R206.2@91.631,41.341 ; U34.10@91.544,40.138 ccw(c91.26,40.626) 91.825,40.626 ; U34.10@91.694,39.878 91.825,40.009 91.825,41.147 ; 91.825,41.01 ccw(c92.826,41.01) U34.10@92.118,40.302
NetR207_2: R207.2 U35.10 U36.9 | length 40.5
  Top Layer w0.3: v2(48.55,42.025) 67.175,42.025 68.326,40.874 ; v2@48.656,41.919 cw(c48.912,41.663) 48.912,42.025 cw(c48.912,42.387) v2@48.656,42.131 ; U35.10@68.046,40.408 ccw(c67.799,40.874) 68.326,40.874 ; U35.10@68.326,39.878 68.326,40.874 ; U35.10@68.606,40.408 cw(c68.853,40.874) 68.326,40.874
  Bottom Layer w0.3: U36.9@42.418,39.37 45.073,42.025 v2(48.55,42.025) ; U36.9@42.418,39.97 ccw(c42.418,41.419) 43.442,40.394 ccw(c44.467,39.37) U36.9@43.018,39.37 ; v2@48.444,41.919 ccw(c48.188,41.663) 48.188,42.025 ccw(c48.188,42.387) v2@48.444,42.131 ; R207.2@67.71,41.438 cw(c66.222,39.95) U35.10@68.326,39.95 ; R207.2@67.891,41.713 68.326,41.278 ; U35.10@67.912,40.312 ccw(c66.993,41.278) 68.326,41.278 ; R207.2@67.922,41.65 cw(c66.946,40.674) 68.326,40.674 ; R207.2@68.134,41.862 cw(c67.67,41.399) 68.326,41.399 ; U35.10@68.326,39.878 68.326,41.278 ; U35.10@68.74,40.312 cw(c69.659,41.278) 68.326,41.278
RELAY1: P35.4 R365.2 | length 6.4
  Top Layer w0.5: R365.2@133.547,37.265 133.728,37.084 P35.4@137.16,37.084 ; R365.2@133.751,37.376 ccw(c134.455,38.08) 134.455,37.084 ; P35.4@136.806,36.73 ccw(c135.953,35.877) 135.953,37.084 ccw(c135.953,38.291) P35.4@136.806,37.438
VCC_DI: F1.1 R97.2 R98.2 R99.2 R100.2 R101.2 R102.2 R103.2 R104.2 R113.1 R114.1 R115.1 R116.1 R117.1 R118.1 R119.1 R120.1 | length 288.1
  Top Layer w0.7: v3@171.85,92.565 cw(c171.85,91.877) 172.337,92.363 cw(c172.823,92.85) v3@172.135,92.85 ; v3(171.85,92.85) 173.1,91.6 173.1,87.394 v3(174.044,86.45) ; v3@173.759,86.45 ccw(c173.071,86.45) 173.557,86.937 ccw(c174.044,87.423) v3@174.044,86.735
  Top Layer w1.5: v5@176.945,50.095 cw(c174.88,48.03) 177.8,48.03 ; F1.1@177.321,45.226 ccw(c176.166,46.381) 177.8,46.381 ; v5(177.475,50.625) 177.475,50.5 177.8,50.175 F1.1@177.8,44.872
  Bottom Layer w0.4: 47.75,87.213 ccw(c48.921,87.213) R103.2@48.093,86.386 ; R103.2@47.947,86.146 47.75,86.343 47.75,91.35 49.25,92.85 ; 51.706,86.558 ccw(c52.495,86.558) R102.2@51.937,86 ; 51.706,87.523 ccw(c53.461,87.523) R102.2@52.22,86.283 ; R102.2@52.074,86.043 51.706,86.411 51.706,91.006 53.55,92.85 ; 55.666,86.668 ccw(c56.752,86.668) R101.2@55.984,85.9 ; 55.666,87.633 ccw(c57.718,87.633) R101.2@56.267,86.183 ; R101.2@56.121,85.943 55.666,86.398 55.666,90.891 57.625,92.85 ; 59.626,87.045 ccw(c61.023,87.045) R100.2@60.035,86.058 ; 59.626,88.011 ccw(c61.989,88.011) R100.2@60.318,86.341 ; 59.673,86.6 ccw(c60.154,87.082) R100.2@60.168,86.401 ; R100.2@60.172,86.101 59.626,86.647 59.626,91.026 61.45,92.85 ; 63.586,86.469 ccw(c64.532,86.469) R99.2@63.863,85.8 ; 63.586,87.434 ccw(c65.498,87.434) R99.2@64.146,86.083 ; R99.2@64,85.843 63.586,86.257 63.586,90.811 65.625,92.85 ; 67.546,87.111 ccw(c68.894,87.111) R98.2@67.941,86.158 ; R98.2@67.795,85.918 67.546,86.167 67.546,90.171 70.225,92.85 ; 71.506,87.02 ccw(c72.783,87.02) R97.2@71.88,86.118 ; R97.2@71.734,85.878 71.506,86.106 71.506,91.106 73.25,92.85
  Bottom Layer w0.7: v3@171.85,92.565 cw(c171.85,91.877) 172.337,92.363 cw(c172.823,92.85) v3@172.135,92.85 ; v3(171.85,92.85) 173.1,91.6 173.1,87.394 v3(174.044,86.45) ; v3@173.759,86.45 ccw(c173.071,86.45) 173.557,86.937 ccw(c174.044,87.423) v3@174.044,86.735
  Bottom Layer w0.9: R118.1@43.823,84.295 R104.2@43.823,86.005 ; R117.1@47.947,84.443 R103.2@47.947,86.146 ; R120.1@52.074,84.334 R102.2@52.074,86.043 ; R116.1@56.121,84.234 R101.2@56.121,85.943 ; R115.1@60.172,84.392 R100.2@60.172,86.101 ; R119.1@64,84.134 R99.2@64,85.843 ; R114.1@67.795,84.209 R98.2@67.795,85.918 ; R113.1@71.734,84.128 R97.2@71.734,85.878
  Bottom Layer w1.3: v3(174.044,86.45) 179.969,80.525 179.969,53.119 v5(177.475,50.625) ; v5@177.475,51.475 ccw(c177.475,53.527) 178.926,52.076 ccw(c180.377,50.625) v5@178.325,50.625
  Bottom Layer w1.5: 43.823,86.512 43.24,87.095 43.24,90.346 45.744,92.85 49.25,92.85 53.55,92.85 57.625,92.85 61.45,92.85 65.625,92.85 70.225,92.85 73.25,92.85 v3(171.85,92.85) ; 43.24,86.677 ccw(c44.401,86.677) 43.58,85.856 cw(c44.401,86.677) 43.24,86.677
VCC_DI0: D56.2 P45.1 P47.1 | length 15.7
  Top Layer w2: D56.2@173.706,52.802 174.244,53.34 P45.1@174.244,55.88 ; P45.1@173.714,55.35 cw(c172.433,54.069) 174.244,54.069 cw(c176.055,54.069) P45.1@174.774,55.35 ; D56.2@173.731,53.077 ccw(c172.493,54.315) P45.1@174.244,54.315
  Top Layer w3.5: P47.1@175.978,56.598 cw(c174.244,58.333) P45.1@174.244,55.88 ; P45.1@174.244,55.88 ccw(c174.244,58.759) P47.1@176.784,57.404 175.26,55.88 P45.1@174.244,55.88
pads on no net: Designator12.0 Designator12.2 Designator12.3 Designator12.4 Designator12.5 Designator12.6 Designator12.7 Designator12.8 Designator12.9 Designator13.0 Designator13.2 Designator13.3 Designator13.4 Designator13.5 Designator13.6 Designator13.7 Designator13.8 Designator13.9 K5.5 P3.3 P3.4 U33.9 U34.7 U35.7 U36.7
copper on no net: | length 9.8
  Top Layer w1.5: 44.958,46.99 44.958,48.142 ; 68.326,47.498 68.326,48.774 ; 91.694,47.498 91.694,47.744 92.5,48.55 ; 170.18,36.136 170.18,37.084 ; 172.72,36.136 172.72,37.084
  Bottom Layer w1.5: 44.958,46.99 44.958,48.242 ; 112.522,39.878 112.522,40.853 ; 170.18,36.151 170.18,37.084 ; 172.72,36.136 172.72,37.084

## Polygon pours and split planes (outlines as drawn)
GND on Top Layer "Top Layer-No Net" (hatched 90Degree grid 0 track 0.203, remove dead copper, pour order 1000): 35.125,93.875 35.125,35.125 180.875,35.125 180.875,93.875
GND on Bottom Layer "Top Layer-No Net" (hatched 90Degree grid 0 track 0.203, remove dead copper, pour order 1001): 35.125,93.875 35.125,35.125 180.875,35.125 180.875,93.875

## Keep-outs
Keep-Out Layer:
  lines w0.254: 31.492,36.524 32,35 ; 31.492,92.476 32,94 ; 31.746,35 32.254,35 ; 31.746,94 32.254,94 ; 32,59.396 32,35 ; 32,69.604 32,94 ; 32.508,36.524 32,35 ; 32.508,92.476 32,94 ; 35,96.746 35,97.254 ; 36.524,96.492 35,97 ; 36.524,97.508 35,97 ; 102.261,97 35,97 ; 113.739,97 181,97 ; 179.476,96.492 181,97 ; 179.476,97.508 181,97 ; 181,96.746 181,97.254 ; 35,37 ccw(c37,37) 37,35 179,35 ccw(c179,37) 181,37 181,92 ccw(c179,92) 179,94 37,94 ccw(c37,92) 35,92 35,37
  text "146 (mm)" at 102.515,96.086 h1.52
  text "59 (mm)" at 32.914,59.65 h1.52 r90

## Silkscreen, mask and mechanical layers (free items; w line width, h text height)
Top Overlay:
  text "21" at 90.31,93.818 h1.2 r180
  text "16" at 111.835,93.81 h1.2 r180
  text "30" at 54.5,93.775 h1.2 r180
  text "29" at 58.45,93.775 h1.2 r180
  text "26" at 70.45,93.775 h1.2 r180
  text "23" at 82.6,93.775 h1.2 r180
  text "25" at 74.325,93.75 h1.2 r180
  text "22" at 86.51,93.755 h1.2 r180
  text "17" at 105.908,93.749 h1.2 r180
  text "15" at 116.15,93.75 h1.2 r180
  text "9" at 139.725,93.75 h1.2 r180
  text "6" at 151.425,93.75 h1.2 r180
  text "32" at 46.325,93.725 h1.2 r180
  text "31" at 50.075,93.725 h1.2 r180
  text "20" at 94.472,93.731 h1.2 r180
  text "24" at 78.675,93.7 h1.2 r180
  text "13" at 124.2,93.7 h1.2 r180
  text "12" at 127.975,93.7 h1.2 r180
  text "11" at 131.825,93.7 h1.2 r180
  text "10" at 135.825,93.7 h1.2 r180
  text "7" at 147.475,93.7 h1.2 r180
  text "3" at 163.225,93.7 h1.2 r180
  text "28" at 62.75,93.675 h1.2 r180
  text "19" at 98.14,93.673 h1.2 r180
  text "18" at 102.097,93.686 h1.2 r180
  text "14" at 120.1,93.675 h1.2 r180
  text "8" at 143.7,93.675 h1.2 r180
  text "5" at 155.225,93.675 h1.2 r180
  text "4" at 159.6,93.675 h1.2 r180
  text "2" at 166.9,93.675 h1.2 r180
  text "27" at 66.525,93.65 h1.2 r180
  text "1" at 170.55,93.65 h1.2 r180
  text "+" at 177.5,52.625 h2 r90
  text "-" at 159.375,37.425 h2 r90
  text "RUYI SAMPLE V3.0" at 52.975,36.225 h1
Top Solder:
  lines w2: 173.706,52.802 174.244,53.34 174.244,55.88
Bottom Solder:
  lines w1.8: 167.8,47.775 168.679,47.775 ; 168.679,47.825 168.686,47.832
  lines w2: 167.125,44.45 167.125,47.125 167.15,47.125 167.8,47.775
  lines w3.5: 141.732,42.164 141.818,42.25 145.975,42.25 146.845,43.12 146.845,43.18 ; 161.045,37.18 161.1,37.235 161.1,39.075 164.697,42.672 167.64,42.672